# Altium PCB Christamas PCB.PcbDoc
Units mil, origin at the board's own origin, x right, y up, seen from the top; angles counter-clockwise.
Board outline 2343.86 x 2362.2 mil, 2 copper layers (Top Layer, Bottom Layer); 25 components, 14 nets, 50 pads, 0 vias.
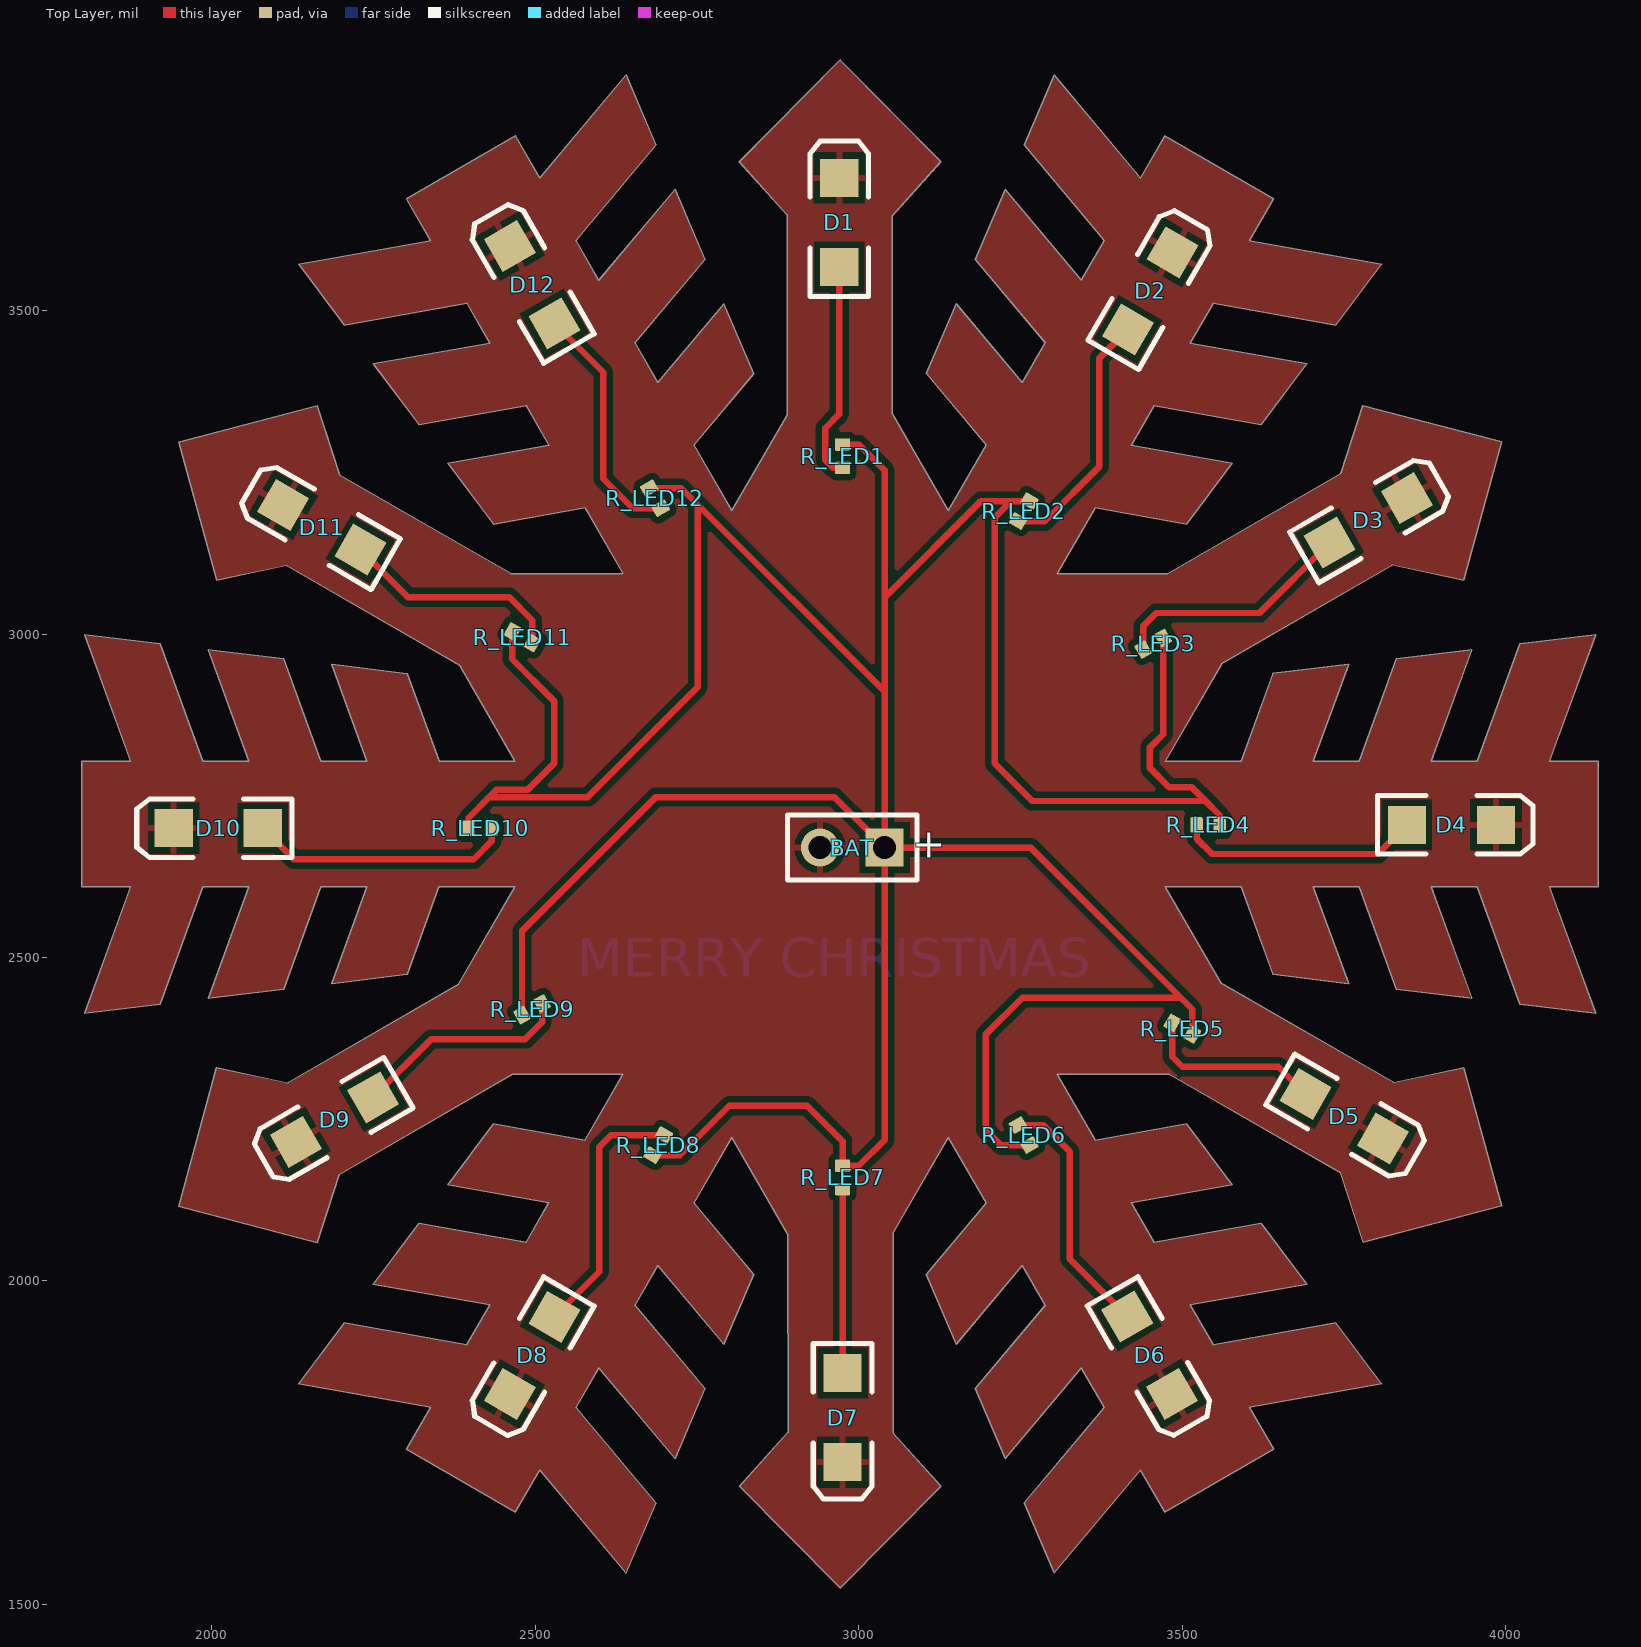
[diagram p0: Top Layer view]
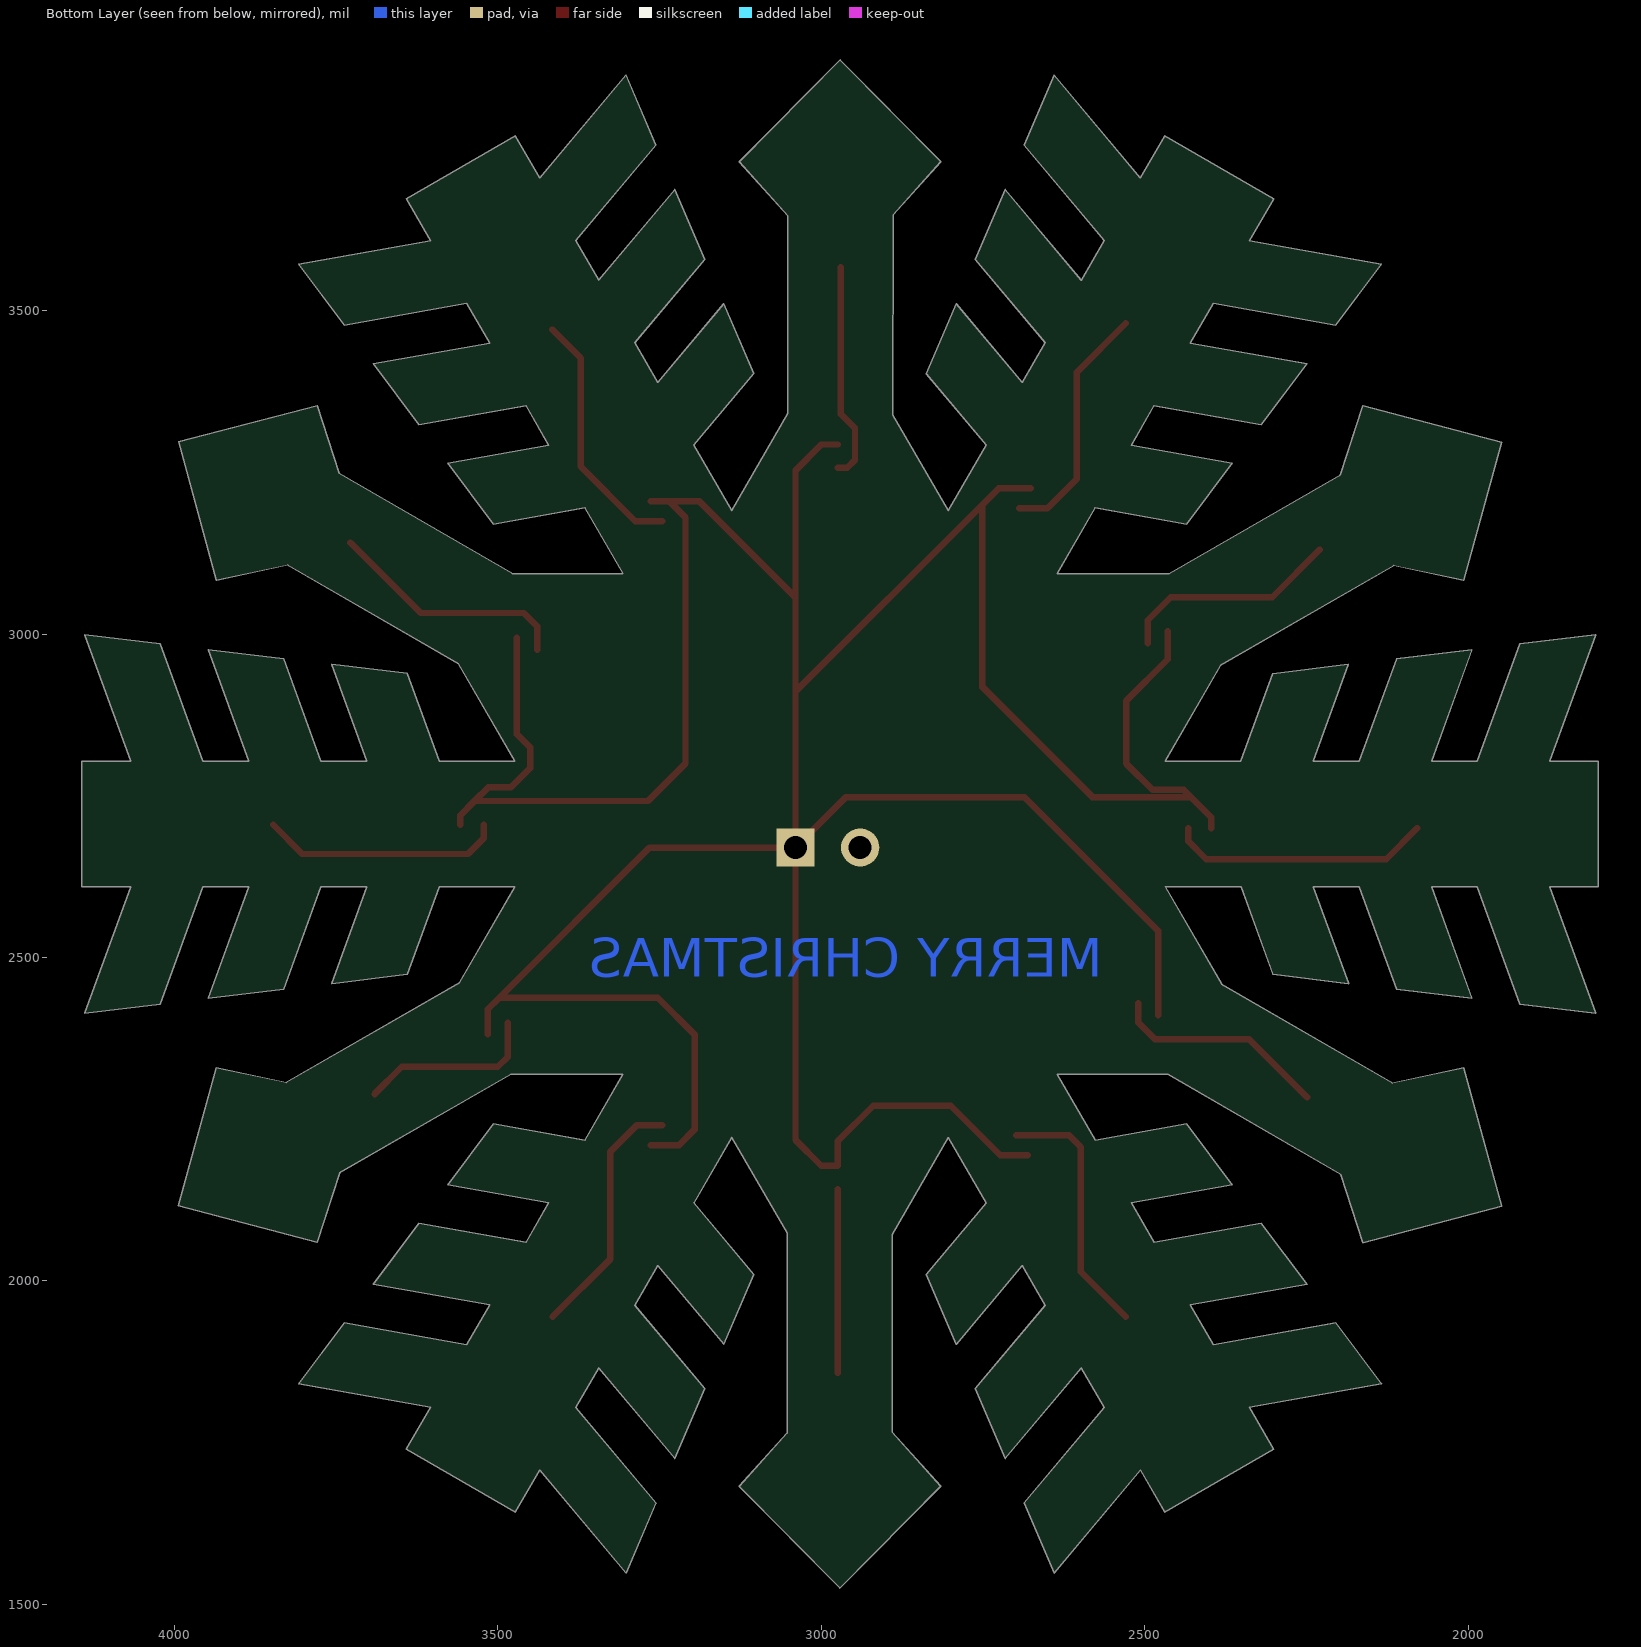
[diagram p1: Bottom Layer view, seen from below]

## Layer stack, top to bottom
Top Solder: solder mask 0.4, Solder Resist, Dk 3.5
Top Layer: signal copper 1.4
Dielectric 1: dielectric 12.6, FR-4, Dk 4.8
Bottom Layer: signal copper 1.4
Bottom Solder: solder mask 0.4, Solder Resist, Dk 3.5

## Board outline
1948.68,2115.6 2162.99,2059.4 2197.03,2164.54 2464.49,2319.4 2635.39,2319.4 2576.89,2217.89 2435.24,2242.93 2364.68,2148.68 2521.06,2121.16 2485.71,2059.78 2319.94,2089.03 2249.21,1994.78 2429.68,1963.05 2394.31,1901.69 2204.67,1935.13 2134.11,1840.88 2338.48,1804.93 2300.83,1739.76 2469.25,1642.63 2506.73,1707.63 2640.18,1548.58 2686.63,1656.79 2562.93,1804.36 2598.31,1865.74 2716.06,1725.41 2762.34,1833.62 2654.13,1962.47 2689.49,2023.85 2791.59,1902.06 2837.85,2010.27 2745.32,2120.58 2803.82,2221.71 2890.43,2071.65 2890.81,1766.51 2815.49,1682.79 2971.3,1525.25 3127.11,1682.79 3053.11,1764.99 3052.93,2073.93 3138.39,2222.1 3196.89,2120.58 3104.35,2010.27 3150.61,1902.26 3252.72,2023.85 3288.27,1962.47 3180.06,1833.62 3226.32,1725.41 3344.09,1865.74 3379.47,1804.56 3255.57,1656.79 3301.85,1548.77 3435.3,1707.83 3472.95,1642.63 3641.38,1739.93 3603.72,1804.93 3808.09,1841.08 3737.54,1935.13 3547.89,1901.69 3512.32,1963.05 3692.8,1994.97 3622.26,2089.03 3456.5,2059.78 3421.14,2121.16 3577.52,2148.68 3506.97,2242.93 3365.32,2217.89 3306.81,2319.21 3480.22,2319.21 3744.61,2167.04 3779.41,2059.78 3993.72,2116 3935.22,2329.74 3827.2,2306.79 3559.35,2461.08 3473.9,2609.05 3590.91,2609.05 3640.24,2473.87 3757.05,2459.74 3702.74,2609.05 3773.48,2609.05 3831.02,2450.94 3947.83,2436.98 3885.14,2609.05 3956.06,2609.05 4022.01,2428.01 4138.82,2414.05 4067.7,2609.23 4143.03,2609.23 4143.03,2803.48 4067.7,2803.48 4138.82,2998.66 4022.01,2984.7 3956.06,2803.66 3885.14,2803.66 3947.83,2975.92 3831.02,2961.77 3773.48,2803.66 3702.74,2803.66 3757.05,2952.97 3640.24,2939.01 3590.91,2803.66 3474.09,2803.66 3560.89,2953.93 3824.9,3106.69 3935.02,3083.36 3993.52,3297.1 3779.21,3353.1 3745.18,3248.16 3477.72,3093.5 3306.61,3093.5 3365.32,3194.82 3506.97,3169.78 3577.52,3264.03 3421.14,3291.55 3456.5,3352.93 3622.26,3323.68 3692.8,3417.93 3512.52,3449.66 3547.89,3511.02 3737.54,3477.57 3808.09,3571.63 3603.72,3607.77 3641.38,3672.95 3472.95,3770.07 3435.47,3705.07 3302.03,3863.93 3255.77,3755.92 3379.65,3608.14 3344.09,3546.96 3226.32,3687.3 3180.06,3579.09 3288.27,3450.23 3252.89,3388.85 3150.81,3510.45 3104.55,3402.43 3197.07,3292.12 3138.58,3190.8 3051.77,3341.06 3051.59,3646.19 3126.91,3729.92 2971.1,3887.45 2815.3,3729.92 2889.09,3647.71 2889.47,3338.77 2803.82,3190.8 2745.32,3292.12 2837.85,3402.24 2791.59,3510.45 2689.49,3388.85 2654.13,3450.23 2762.34,3579.09 2716.06,3687.1 2598.31,3546.77 2562.93,3608.14 2686.63,3755.92 2640.35,3863.93 2507.11,3705.07 2469.45,3770.07 2301.02,3672.77 2338.68,3607.77 2134.31,3571.63 2204.86,3477.38 2394.51,3511.02 2429.88,3449.66 2249.41,3417.73 2320.14,3323.68 2485.89,3352.93 2521.26,3291.55 2364.88,3264.03 2435.41,3169.78 2577.09,3194.82 2635.59,3093.5 2462.18,3093.5 2197.78,3245.86 2162.99,3352.73 1948.68,3296.71 2007.36,3082.97 2115.2,3105.92 2383.03,2951.63 2468.48,2803.66 2351.5,2803.66 2302.36,2938.83 2185.35,2952.97 2239.84,2803.66 2168.72,2803.66 2110.98,2961.77 1994.37,2975.72 2056.89,2803.48 1986.14,2803.48 1920.2,2984.7 1803.39,2998.66 1874.31,2803.48 1799.17,2803.48 1799.17,2609.05 1874.31,2609.05 1803.39,2414.05 1920.2,2428.01 1986.14,2609.05 2056.89,2609.05 1994.37,2436.79 2110.98,2450.74 2168.72,2609.05 2239.47,2609.05 2185.16,2459.74 2301.97,2473.87 2351.1,2609.05 2468.11,2609.05 2381.32,2458.77 2117.3,2306.02 2007.18,2329.34

## Design rules (kind name [scope] priority, off if disabled: settings)
Clearance [All] p1: gap=10 ignorepadtopadclearanceinfootprint=FALSE except(0: Arc-Hole Track-Hole SMDPad-Hole THPad-Hole Via-Hole Fill-Hole Poly-Hole Region-Hole Text-Hole)
PolygonConnect [All] p1: connectstyle=Relief reliefconductorwidth=10 reliefentries=4 polygonreliefangle="90 Angle" airgapwidth=10
RoutingVias [All] p1: holewidth=28 width=50 viastyle="Through Hole" minholewidth=28 minwidth=50 maxholewidth=28 maxwidth=50
SolderMaskExpansion [All] p1: expansion=4
Width [All] p1: maxlimit=10 minlimit=10 preferedwidth=10
30 further rules are at their usual default settings.

## Components (designator, comment, footprint, x,y, rotation, side; value= is the part's Value field where it differs from the comment)
BAT "Battery" BAT-2 2990,2670 r180 top
D1 "LED2" 3.2X1.6X1.1 2970,3636.1 r90 top
D2 "LED2" 3.2X1.6X1.1 3450.55,3530.33 r60 top
D3 "LED2" 3.2X1.6X1.1 3787.54,3175.55 r30 top
D4 "LED2" 3.2X1.6X1.1 3916.1,2705 r0 top
D5 "LED2" 3.2X1.6X1.1 3750.33,2254.45 r330 top
D6 "LED2" 3.2X1.6X1.1 3449.45,1885.33 r300 top
D7 "LED2" 3.2X1.6X1.1 2975,1788.9 r270 top
D8 "LED2" 3.2X1.6X1.1 2495,1885 r240 top
D9 "LED2" 3.2X1.6X1.1 2189.67,2249.45 r210 top
D10 "LED2" 3.2X1.6X1.1 2010,2700 r180 top
D11 "LED2" 3.2X1.6X1.1 2170,3165 r150 top
D12 "LED2" 3.2X1.6X1.1 2495,3540 r120 top
R_LED1 "320" RESC1005X35N 2975,3275 r90 top value="1070000.00 Ohm"
R_LED2 "320" RESC1005X35N 3255,3190 r60 top value="1070000.00 Ohm"
R_LED3 "320" RESC1005X35N 3455,2985 r30 top value="1070000.00 Ohm"
R_LED4 "320" RESC1005X35N 3540,2705 r0 top value="1070000.00 Ohm"
R_LED5 "320" RESC1005X35N 3500,2390 r330 top value="1070000.00 Ohm"
R_LED6 "320" RESC1005X35N 3255,2225.51 r300 top value="1070000.00 Ohm"
R_LED7 "320" RESC1005X35N 2975,2160 r90 top value="1070000.00 Ohm"
R_LED8 "320" RESC1005X35N 2690,2210 r240 top value="1070000.00 Ohm"
R_LED9 "320" RESC1005X35N 2495,2420 r210 top value="1070000.00 Ohm"
R_LED10 "320" RESC1005X35N 2415,2700 r180 top value="1070000.00 Ohm"
R_LED11 "320" RESC1005X35N 2480,2995 r150 top value="1070000.00 Ohm"
R_LED12 "320" RESC1005X35N 2685,3210 r120 top value="1070000.00 Ohm"

## Footprints (in the part's own frame and the unit in brackets; to place one, negate y for a bottom-side part, rotate by r counter-clockwise, add the part's x,y. Pads: shape width x height; smd on the part's side, far side on the other; paste and mask are expansions set on the pad)
3.2X1.6X1.1 [mm] "SMT LED; 2 Flat Leads"
  rect 1.5x1.5 smd: 1(-1.75,0) 2(1.75,0)
  silkscreen extent -2.9,-1.15 3.2,1.15
BAT-2 [mm] "Battery; 2 Leads"
  rect 1.5x1.5 hole 0.9: 1(-1.27,0)
  round 1.5 hole 0.9: 2(1.27,0)
  silkscreen extent -2.54,-1.27 2.54,1.27
RESC1005X35N [mm]
  rrect20% 0.49x0.6 smd: 1(-0.455,0) 2(0.455,0)

## Part data
BAT: "Multicell Battery", LatestRevisionDate=17-Jul-2002, LatestRevisionNote="Re-released for DXP Platform.", PackageDescription="Battery; 2 Leads", PackageReference=BAT-2, Published=24-Mar-1999, Publisher="Altium Limited"
D1 D2 D3 D4 D5 D6 D7 D8 D9 D10 D11 D12: "Typical RED, GREEN, YELLOW, AMBER GaAs LED", LatestRevisionDate=17-Jul-2002, LatestRevisionNote="Re-released for DXP Platform.", PackageDescription="SM LED; 2 Flat Leads", PackageReference=3.2X1.6X1.1, PackageVersion=Feb-2002, Published=8-Jun-2000, Publisher="Altium Limited"
R_LED1 R_LED2 R_LED3 R_LED4 R_LED5 R_LED6 R_LED7 R_LED8 R_LED9 R_LED10 R_LED11 R_LED12: library part RES, "1M07 0.125W 1% 0805 (2012 Metric)  SMD", Case-EIA=0805, Case-Metric=2012, Power="0.125 W", Tolerance="1 %", Technology=SMT

## Nets (pads, with @x,y where several pads share a name; then routed paths per layer and width w, separated by ;. In a path a pad name is that pad's centre, name@x,y a point inside that pad or via, vN(x,y) a via of type N, cw(c..) or ccw(c..) an arc to the next point about the centre after c; other vN are vias at no path point)
3.3VB: BAT.1 R_LED1.2 R_LED2.2 R_LED3.2 R_LED4.2 R_LED5.2 R_LED6.2 R_LED7.2 R_LED8.2 R_LED9.2 R_LED10.2 R_LED11.2 R_LED12.2 | length 6557.8
  Top Layer w10: R_LED10.2 2397.09,2716.09 2429,2748 ; R_LED11.2 2464.49,2961 2529,2896.49 2529,2800 2488,2759 2440,2759 2429,2748 ; R_LED9.2 2479.49,2541 2686.49,2748 2962,2748 BAT.1 ; R_LED12.2 2725.49,3225.51 2751,3200 ; R_LED8.2 2723.49,2194.49 2800,2271 2920,2271 2975,2216 R_LED7.2 3000,2177.91 3040,2217.91 BAT.1 ; R_LED1.2 3000,3292.91 3040,3252.91 3040,3056.51 ; R_LED6.2 3220,2210 3196,2234 3196,2381 3253,2438 3497.51,2438 ; R_LED2.2 3235.51,3205.51 ; R_LED3.2 3470.51,2845.21 3450,2824.69 3450,2792.88 3480,2762.88 3515.04,2762.88 3536,2741.91 ; R_LED5.2 3515.51,2420 3497.51,2438 ; R_LED4.2 3557.91,2720 3536,2741.91 ; 2429,2748 2581,2748 2751,2918 2751,3200 ; 2751,3200 3040,2911 ; BAT.1 3265.51,2670 3497.51,2438 ; BAT.1 3040,2772 3040,2911 ; 3040,2911 3040,3056.51 ; 3040,3056.51 3189,3205.51 3235.51,3205.51 ; 3235.51,3205.51 3210,3180 3210,2800 3268.09,2741.91 3536,2741.91
GND: BAT.2 D1.2 D2.2 D3.2 D4.2 D5.2 D6.2 D7.2 D8.2 D9.2 D10.2 D11.2 D12.2
NetD1_1: D1.1 R_LED1.1 | length 339.2
  Top Layer w10: D1.1 2970,3340 2948,3318 2948,3269.09 2960,3257.09 R_LED1.1
NetD2_1: D2.1 R_LED2.1 | length 390.9
  Top Layer w10: R_LED2.1 3287.49,3174.49 3372,3259 3372,3426.56 D2.1
NetD3_1: D3.1 R_LED3.1 | length 377.8
  Top Layer w10: R_LED3.1 3439.49,3011.97 3460,3032.49 3619.25,3032.49 D3.1
NetD4_1: D4.1 R_LED4.1 | length 374.6
  Top Layer w10: R_LED4.1 3522.09,2684.09 3546.17,2660 3802.2,2660 D4.1
NetD5_1: D5.1 R_LED5.1 | length 282.5
  Top Layer w10: R_LED5.1 3484.49,2346.51 3500,2331 3648.56,2331 D5.1
NetD6_1: D6.1 R_LED6.1 | length 388.8
  Top Layer w10: R_LED6.1 3284.97,2241.03 3326,2200 3326,2034 D6.1
NetD7_1: D7.1 R_LED7.1 | length 284.3
  Top Layer w10: D7.1 R_LED7.1
NetD8_1: D8.1 R_LED8.1 | length 398.8
  Top Layer w10: D8.1 2599,2014.22 2599,2207 2617.51,2225.51 R_LED8.1
NetD9_1: D9.1 R_LED9.1 | length 338.2
  Top Layer w10: D9.1 2339.44,2374 2484.51,2374 2510.51,2400 R_LED9.1
NetD10_1: D10.1 R_LED10.1 | length 405.5
  Top Layer w10: D10.1 2126.9,2652 2404.91,2652 2432.91,2680 R_LED10.1
NetD11_1: D11.1 R_LED11.1 | length 346.5
  Top Layer w10: D11.1 2303.22,3057 2460,3057 2495.51,3021.49 R_LED11.1
NetD12_1: D12.1 R_LED12.1 | length 379.4
  Top Layer w10: D12.1 2605,3404.78 2605,3240 2650.51,3194.49 R_LED12.1

## Polygon pours and split planes (outlines as drawn)
GND on Top Layer "GND" (solid, pour order 0): 211 vertices, not listed, extent 1799.17,1525.25 4143.03,3887.45

## Other copper
Bottom Layer:
  text "MERRY CHRISTMAS" at 2565,2470 h60

## Text inside footprints (layer, text, board x,y; h text height)
BAT: Top Overlay "+" at 3134.49,2692.72 h45.28 r180